# EAGLE board untitled (EAGLE 5.11)
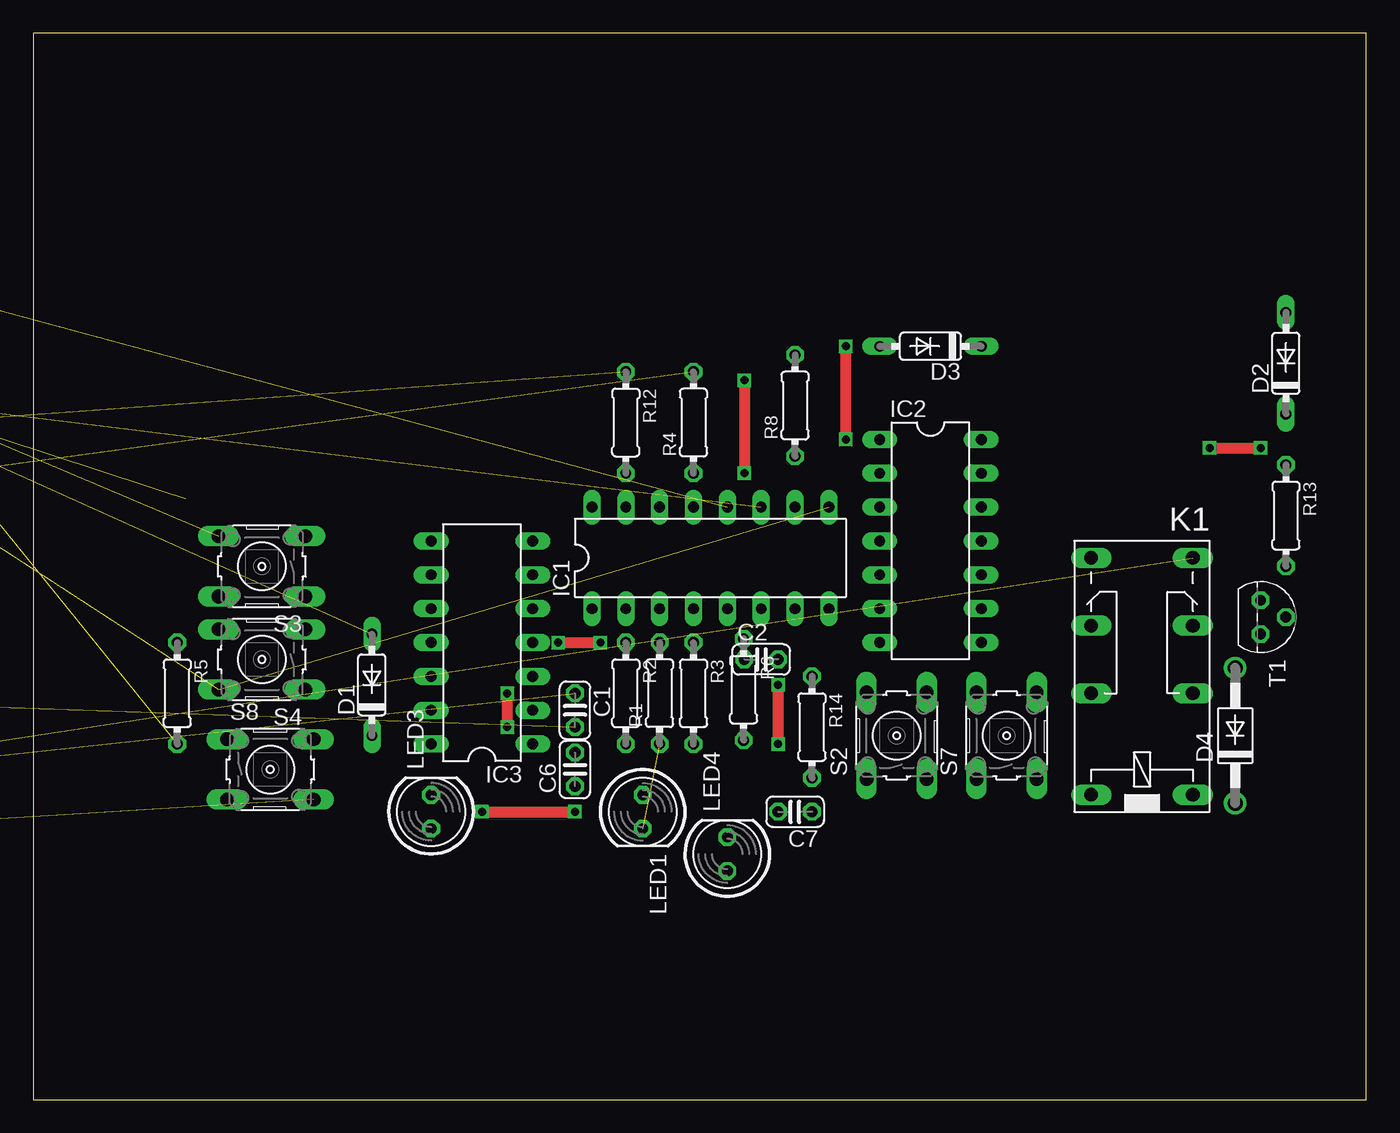
[diagram p0: board, top side]
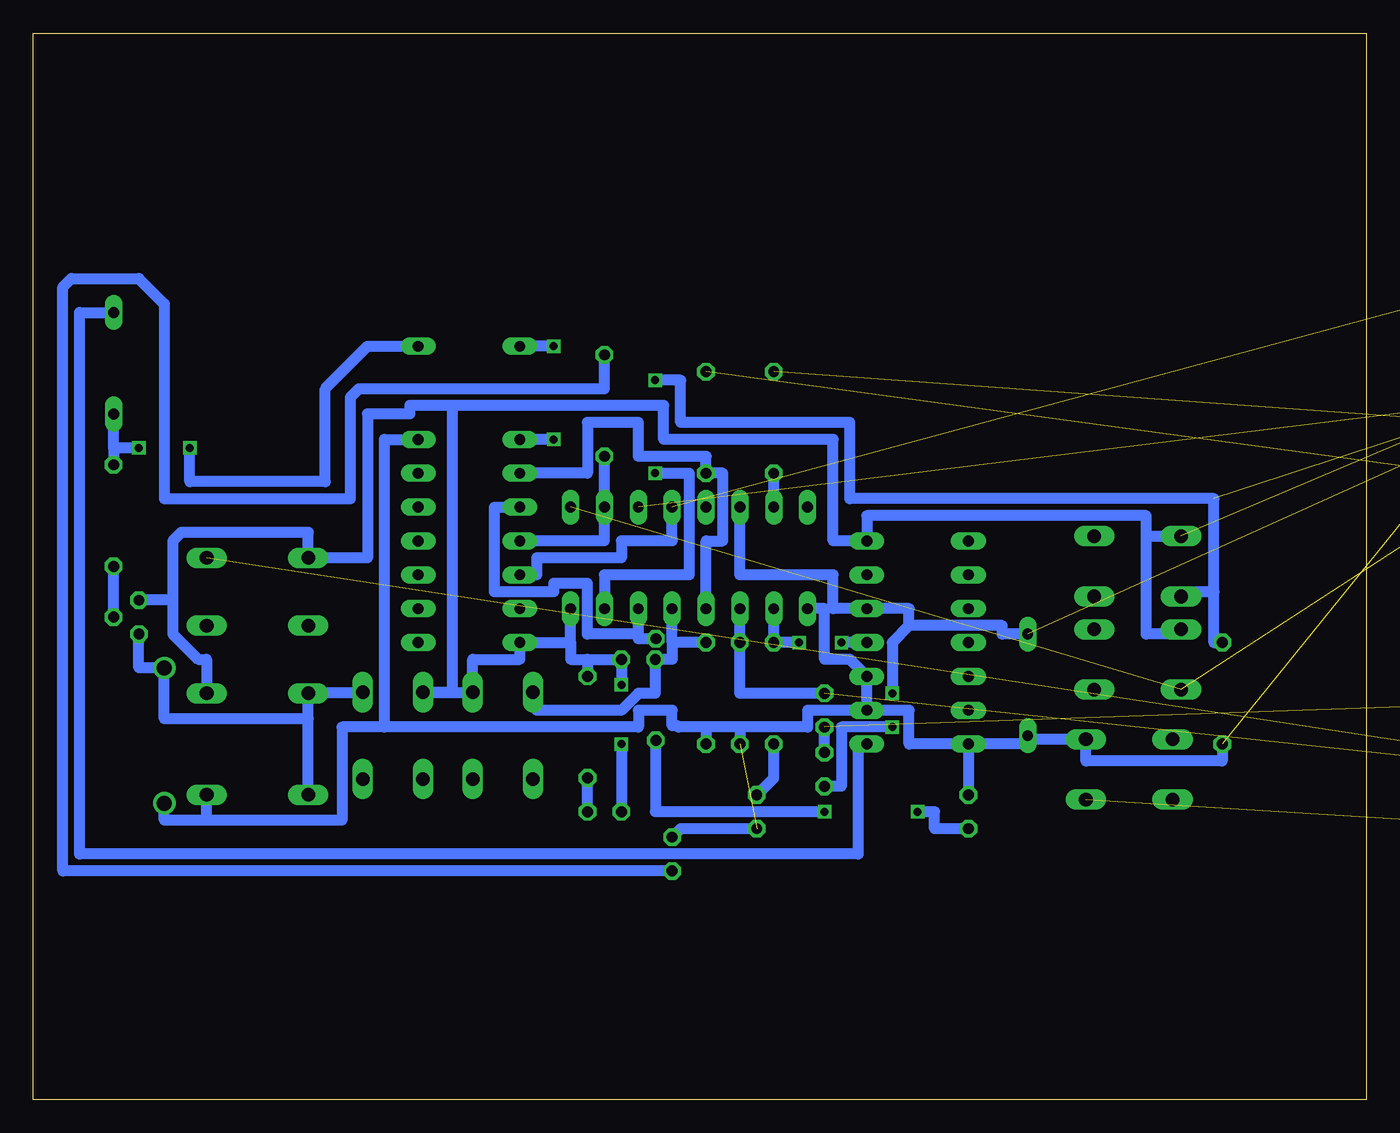
[diagram p1: board, bottom side, seen from below]

Size 100 x 80 mm. Coordinates in mm from the lower left corner, seen from the top.
Outline: 0,0 100,0 100,80 0,80 0,0
Copper layers (1*16): Top 0.035mm / dielectric 1.5mm / Bottom 0.035mm
Design rules "default": minimum track width 10mil, minimum drill 24mil, track to track 8mil, track to pad 8mil, pad to pad 8mil, via to via 8mil, smd to smd 8mil, copper to edge 40mil, drill to drill 8mil, minimum pad ring 10mil, minimum via ring 8mil, stop-mask expansion 4mil, vias tented up to drill 0mil, thermal gap 10mil

## Footprints (pad centres in the part's own frame; a part is rotated, then mirrored left to right if it is on the bottom)
BORNE_2_PCI = drill 0.8 long: P$1 -3.08,-0.08; P$2 2.92,-0.08
C025-024X044 = drill 0.813 octagon: 1 -1.27,0; 2 1.27,0
DO35-7 = drill 0.813 long: A 3.81,0; C -3.81,0
DO41-10 = drill 1.118 round: A 5.08,0; C -5.08,0
DIL16 = drill 0.813 long: 1 -8.89,-3.81; 2 -6.35,-3.81; 3 -3.81,-3.81; 4 -1.27,-3.81; 5 1.27,-3.81; 6 3.81,-3.81; 7 6.35,-3.81; 8 8.89,-3.81; 9 8.89,3.81; 10 6.35,3.81; 11 3.81,3.81; 12 1.27,3.81; 13 -1.27,3.81; 14 -3.81,3.81; 15 -6.35,3.81; 16 -8.89,3.81
DIL14 = drill 0.813 long: 1 -7.62,-3.81; 2 -5.08,-3.81; 3 -2.54,-3.81; 4 0,-3.81; 5 2.54,-3.81; 6 5.08,-3.81; 7 7.62,-3.81; 8 7.62,3.81; 9 5.08,3.81; 10 2.54,3.81; 11 0,3.81; 12 -2.54,3.81; 13 -5.08,3.81; 14 -7.62,3.81
351 = drill 1.016 long: 1 -3.81,-3.81; 16 -3.81,3.81; O1 8.89,-3.81; O2 8.89,3.81; P1 3.81,-3.81; P2 3.81,3.81; S1 13.97,-3.81; S2 13.97,3.81
LED5MM = drill 0.813 octagon: A -1.27,0; K 1.27,0
LSP11 = drill 1.118 pad 2.159 octagon: MP 0,0
0204/7 = drill 0.813 octagon: 1 -3.81,0; 2 3.81,0
B3F-10XX = drill 1.016 long: 1 -3.251,2.261; 2 3.251,2.261; 3 -3.251,-2.261; 4 3.251,-2.261
TO92 = drill 0.813 octagon: 1 1.27,0; 2 0,1.905; 3 -1.27,0

## Placement (x,y rotation side)
BORNE_2_PCI1  BORNE_2_PCI  [BORNE_2_PCI]  -59.69,17.78 0 top  (outside the outline)
C1  100n  [C025-024X044]  40.64,29.21 270 top
C2  100n  [C025-024X044]  54.61,33.02 0 top
C3  100n  [C025-024X044]  -16.51,54.61 0 top  (outside the outline)
C4  100n  [C025-024X044]  -21.59,54.61 0 top  (outside the outline)
C5  100n  [C025-024X044]  -26.67,54.61 0 top  (outside the outline)
C6  [C025-024X044]  40.64,24.77 90 top
C7  1uF  [C025-024X044]  57.15,21.59 180 top
D1  1N4148DO35-7  [DO35-7]  25.4,31.11 90 top
D2  1N4148DO35-7  [DO35-7]  93.98,55.24 90 top
D3  1N4148DO35-7  [DO35-7]  67.31,56.52 180 top
D4  1N4004  [DO41-10]  90.17,27.3 90 top
IC1  4050N  [DIL16]  50.8,40.64 0 top
IC2  4072N  [DIL14]  67.31,41.91 270 top
IC3  4082N  [DIL14]  33.66,34.29 90 top
K1  351  [351]  83.19,26.67 90 top
LED1  [LED5MM]  45.72,21.59 270 top
LED2  [LED5MM]  -71.12,38.1 0 top  (outside the outline)
LED3  [LED5MM]  29.84,21.59 90 top
LED4  [LED5MM]  52.07,18.41 90 top
LED5  [LED5MM]  -46.99,46.99 0 top  (outside the outline)
LED6  [LED5MM]  -59.69,46.99 0 top  (outside the outline)
LSP1  LSP11  [LSP11]  -52.07,59.69 0 top  (outside the outline)
LSP2  LSP11  [LSP11]  -58.42,59.69 0 top  (outside the outline)
R1  100k  [0204/7]  46.99,30.48 90 top
R2  1k  [0204/7]  44.45,30.48 270 top
R3  100k  [0204/7]  49.53,30.48 270 top
R4  1k  [0204/7]  49.53,50.8 90 top
R5  100k  [0204/7]  10.79,30.48 270 top
R6  1k  [0204/7]  53.29,30.76 270 top
R7  100k  [0204/7]  -68.58,66.04 0 top  (outside the outline)
R8  1k  [0204/7]  57.15,52.07 90 top
R9  100k  [0204/7]  -27.94,69.85 0 top  (outside the outline)
R10  1k  [0204/7]  -38.1,69.85 0 top  (outside the outline)
R11  220k  [0204/7]  -48.26,69.85 0 top  (outside the outline)
R12  1k  [0204/7]  44.45,50.8 270 top
R13  10k  [0204/7]  93.98,43.81 270 top
R14  100k  [0204/7]  58.42,27.94 270 top
S1  [B3F-10XX]  -71.12,16.51 0 top  (outside the outline)
S2  [B3F-10XX]  64.77,27.3 90 top
S3  [B3F-10XX]  17.14,40.01 180 top
S4  [B3F-10XX]  17.14,33.02 180 top
S5  [B3F-10XX]  -53.34,29.21 0 top  (outside the outline)
S6  [B3F-10XX]  -64.77,29.21 0 top  (outside the outline)
S7  [B3F-10XX]  73.03,27.3 90 top
S8  [B3F-10XX]  17.78,24.77 0 top
T1  2N3904  [TO92]  92.08,36.2 270 top

## Library data of the parts
BORNE_2_PCI1 = BORNE_2_PCI
C1-C7 R1-R14 = rcl
D1-D4 = diode
IC1-IC3 = 40xx
K1 = relay; OC_FARNELL: unknown; OC_NEWARK: unknown
LED1-LED6 = led
LSP1 LSP2 = solpad
S1-S8 = switch-omron; MPN: B3F-1000; OC_FARNELL: 176432; OC_NEWARK: 36M3542
T1 = transistor

## Nets
GND: C2.2 C3.2 C4.2 C5.2 C7.2 IC1.8 IC2.7 IC3.7 K1.P1 K1.S2 LED6.K LSP1.MP R14.1 S2.4 S3.4 S4.4 S5.4 S7.2 T1.3
N$1: C1.1 IC1.3 R1.2 S1.2
N$2: D2.A IC3.1
N$4: LED1.A R2.2
N$5: IC1.2 IC3.4 R2.1
N$6: C2.1 IC1.5 R3.1 S2.2
N$7: C6.1 D1.A IC1.14 IC3.5 R11.1 S6.4
N$8: IC1.4 IC2.2 R4.1
N$9: LED2.A R4.2
N$10: R13.2 T1.2
N$11: C3.1 IC1.7 R5.1 S3.2
N$12: IC1.6 IC2.3 R6.1
N$13: LED3.A R6.2
N$14: D3.A IC2.1
N$15: C4.1 IC1.9 R7.1 S4.2
N$16: D2.C D3.C R13.1
N$17: LED4.A R8.2
N$18: IC1.10 IC2.4 R8.1
N$19: BORNE_2_PCI1.P$1 K1.S1
N$20: C5.1 IC1.11 R9.1 S5.2
N$21: BORNE_2_PCI1.P$2 S8.4
N$22: C7.1 R14.2
N$23: LED5.A R10.2
N$24: IC1.12 IC2.5 R10.1
N$25: LED6.A R12.1
N$26: IC1.15 R12.2
N$27: C1.2 C6.2 S1.4 S6.2
N$28: D4.A K1.16 K1.P2 S7.4 T1.1
VCC: D1.C D4.C IC1.1 IC2.14 IC3.2 IC3.3 IC3.14 K1.1 LED1.K LED2.K LED3.K LED4.K LED5.K LSP2.MP R1.1 R3.2 R5.2 R7.2 R9.2 R11.2 S8.2

## Tracks (layer width: path | path; a pad name or v marks a point on that pad's centre or on a via)
GND  (via drill 0.6)  (6 unrouted)
  Top 0.813: v55.88,31.11 v55.88,26.67
  Bottom 0.813: 59.69,34.29 IC1.8 | 59.69,34.29 IC2.7 63.5,33.02 67.03,33.02 S2.4 S7.2 68.58,30.56 68.58,52.07 | 58.42,33.02 C2.2 v55.88,31.11 | 58.42,33.02 59.69,33.02 59.69,34.29 | 89.53,37.47 T1.3 | 89.53,37.47 89.53,34.92 87.63,33.02 87,33.02 K1.P1 | 89.53,37.47 89.53,41.91 88.9,42.55 79.38,42.55 K1.S2 74.93,40.64 74.93,51.44 71.75,51.44 71.75,52.07 68.58,52.07 | 58.42,33.02 R14.1 | v55.88,26.67 C7.2 | 68.58,52.07 52.7,52.07 52.7,49.53 40.01,49.53 40.01,41.91 IC3.7 37.47,43.81 16.51,43.81 16.51,42.27 | 16.51,42.27 S3.4 | 16.51,42.27 16.51,34.92 13.89,34.92 S4.4
N$1  (1 unrouted)
  Bottom 0.813: IC1.3 R1.2 46.99,30.48 C1.1
N$2
  Bottom 0.813: IC3.1 38.1,26.67 38.1,18.41 96.52,18.41 96.52,59.05 D2.A
N$4
  Bottom 0.813: R2.2 44.45,24.13 LED1.A
N$5  (via drill 0.6)
  Top 0.813: v39.37,34.29 v42.55,34.29
  Bottom 0.813: IC1.2 R2.1 v42.55,34.29 | IC3.4 v39.37,34.29
N$6
  Bottom 0.813: 52.07,34.29 IC1.5 | R3.1 52.07,34.29 | 52.07,34.29 52.07,33.02 C2.1 53.34,30.48 54.61,30.48 55.88,29.21 62.23,29.21 62.23,30.56 S2.2
N$7  (via drill 0.6)  (2 unrouted)
  Top 0.813: v35.56,30.48 v35.56,27.94
  Bottom 0.813: IC1.14 46.99,39.37 40.01,39.37 40.01,36.83 IC3.5 34.29,36.83 34.29,35.56 | D1.A 27.3,34.92 27.3,35.56 34.29,35.56 | C6.1 39.37,23.5 39.37,27.94 v35.56,27.94 | v35.56,30.48 35.56,34.29 34.29,35.56
N$8
  Bottom 0.813: IC1.4 49.53,41.91 48.26,41.91 48.26,46.99 R4.1 49.53,48.26 54.61,48.26 54.61,50.8 58.42,50.8 58.42,46.99 IC2.2
N$9  (1 unrouted)
N$10
  Bottom 0.813: T1.2 R13.2
N$11  (via drill 0.6)  (1 unrouted)
  Top 0.813: v53.34,53.98 v53.34,46.99
  Bottom 0.813: IC1.7 57.15,39.37 50.8,39.37 50.8,46.99 v53.34,46.99 | v53.34,53.98 51.44,53.98 51.44,50.8 38.73,50.8 38.73,45.09 11.43,45.09 11.43,38.1 | 11.43,38.1 13.89,38.1 S3.2 | 11.43,38.1 11.43,34.29 R5.1
N$12
  Bottom 0.813: 54.61,34.92 54.61,34.57 R6.1 | 54.61,34.92 IC1.6 | 54.61,34.92 58.42,34.92 58.42,38.73 60.96,38.73 60.96,38.1 65.41,38.1 65.41,44.45 IC2.3
N$13  (via drill 0.6)
  Top 0.813: v33.66,21.59 v40.64,21.59
  Bottom 0.813: LED3.A 32.38,20.32 32.38,21.59 v33.66,21.59 | v40.64,21.59 53.29,21.59 | 53.29,21.59 53.34,21.59 | 53.29,21.59 R6.2
N$14  (via drill 0.6)
  Top 0.813: v60.96,49.53 v60.96,56.52
  Bottom 0.813: v60.96,49.53 IC2.1 | v60.96,56.52 D3.A
N$15  (3 unrouted)
N$16  (via drill 0.6)
  Top 0.813: v88.27,48.9 v92.08,48.9
  Bottom 0.813: 93.98,48.9 R13.1 | 93.98,48.9 D2.C | D3.C 74.93,56.52 78.11,53.34 78.11,46.35 88.27,46.35 v88.27,48.9 | v92.08,48.9 93.98,48.9
N$17
  Bottom 0.813: R8.2 57.15,53.34 75.56,53.34 76.2,52.7 76.2,45.09 90.17,45.09 90.17,59.69 92.08,61.59 97.16,61.59 97.79,60.96 97.79,17.14 LED4.A
N$18
  Bottom 0.813: R8.1 IC1.10 57.15,41.91 IC2.4
N$19  (1 unrouted)
N$20  (3 unrouted)
N$21  (1 unrouted)
N$22
  Bottom 0.813: C7.1 R14.2
N$23  (1 unrouted)
N$24  (1 unrouted)
  Bottom 0.813: IC2.5 62.23,39.37 62.23,40.64 55.88,40.64 55.88,41.91 52.07,41.91 IC1.12
N$25  (1 unrouted)
N$26
  Bottom 0.813: IC1.15 R12.2
N$27  (2 unrouted)
  Bottom 0.813: C6.2 C1.2
N$28
  Bottom 0.813: S7.4 79.38,30.56 K1.P2 79.38,28.57 | K1.16 79.38,28.57 | 79.38,28.57 90.17,28.57 D4.A 92.08,32.38 T1.1
VCC  (7 unrouted)
  Bottom 0.813: 46.99,27.94 41.91,27.94 41.91,29.21 IC3.2 | 46.99,27.94 49.53,27.94 | 73.66,27.94 73.66,49.53 IC2.14 | 49.53,27.94 R3.2 | 49.53,27.94 51.59,27.94 51.69,28.04 52.07,28.04 52.07,29.21 54.61,29.21 54.61,27.94 73.66,27.94 | 46.99,27.94 R1.1 | 73.66,27.94 76.83,27.94 76.83,20.95 87,20.95 | 87,20.95 K1.1 | D4.C 90.17,20.95 87,20.95 | IC3.14 LED3.K | IC3.2 IC3.3 38.73,33.02 40.64,33.02 40.64,36.83 IC1.1 | IC3.14 25.4,26.67 D1.C 25.4,27.03 S8.2 21.03,25.4 10.79,25.4 R5.2 | IC3.14 34.29,26.67 34.29,29.21 IC3.2 | LED1.K 51.44,20.32 LED4.K